# Altium PCB PCB7_main_board.PcbDoc (part 2 of 3)
Units mm, origin at the board's own origin, x right, y up, seen from the top; angles counter-clockwise.
Board outline 169 x 112 mm, 2 copper layers (Top Layer, Bottom Layer); 275 components, 203 nets, 880 pads, 376 vias.
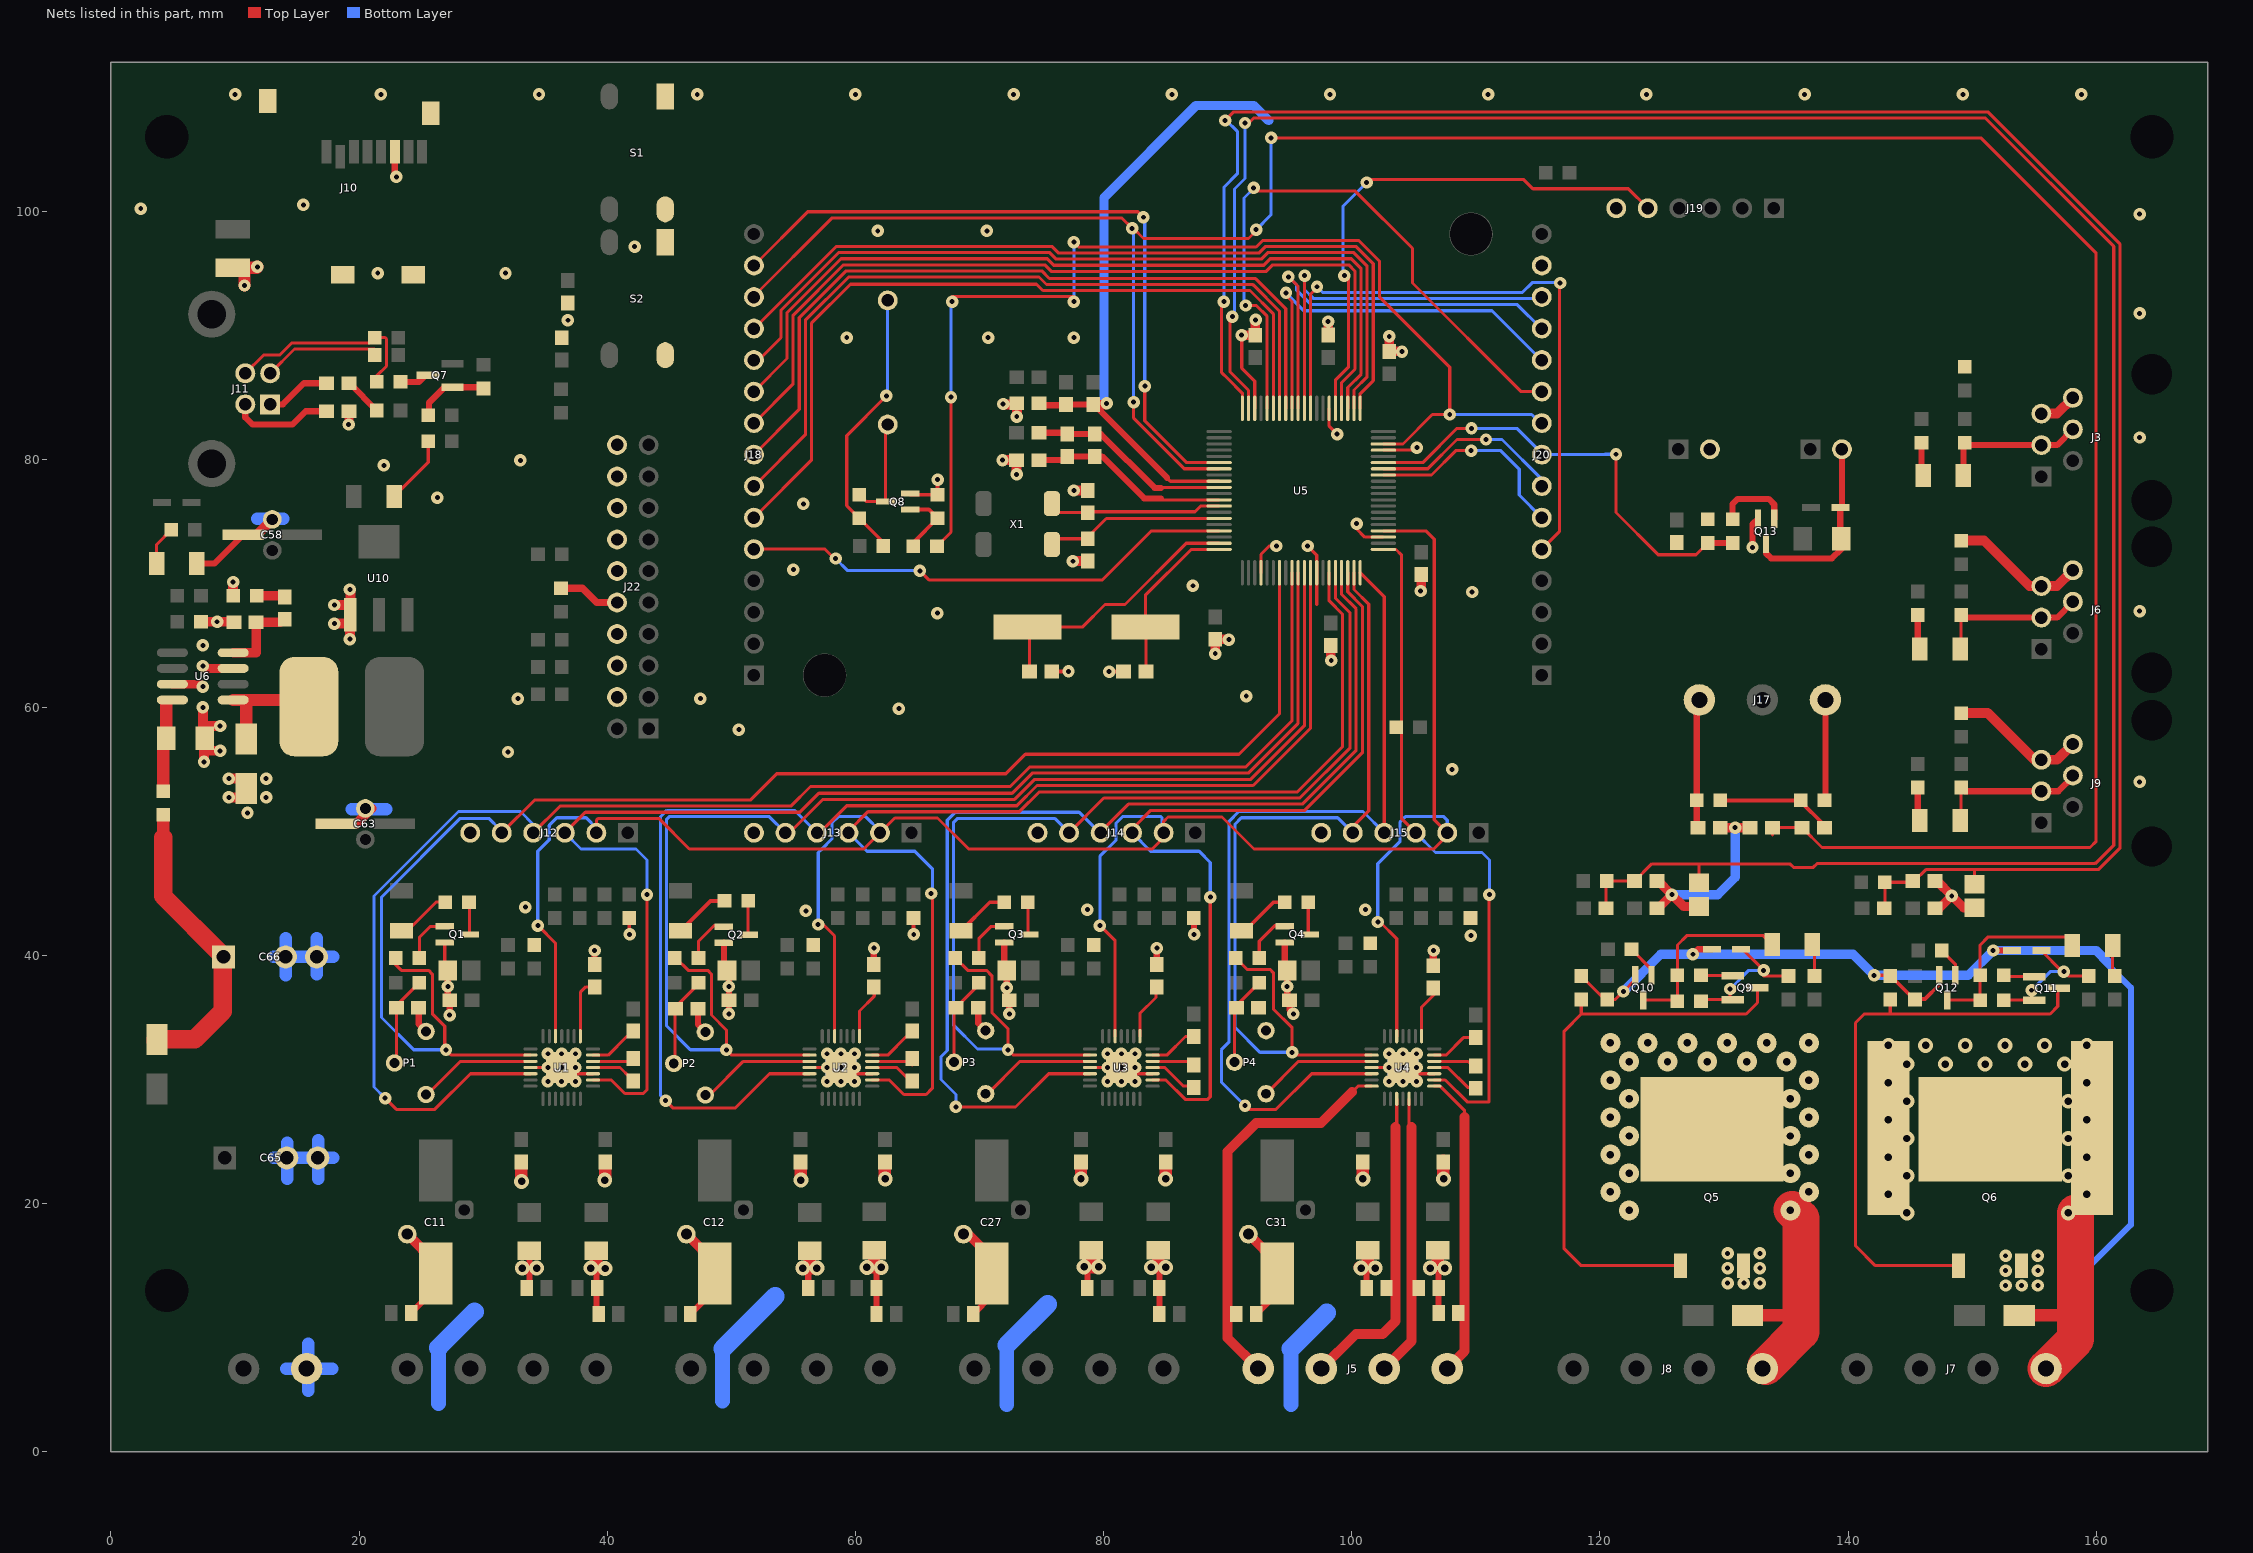
[diagram p2: the nets of this part, all layers, seen from the top]

## Via types
v1: diameter 1, hole 0.4, Top Layer to Bottom Layer, 252 vias
v2: diameter 1.2, hole 0.6, Top Layer to Bottom Layer, 59 vias
v3: diameter 1, hole 0.4, Top Layer to Bottom Layer, tented top, 36 vias
v4: diameter 1.6, hole 0.6, Top Layer to Bottom Layer, 27 vias
v5: diameter 1.6, hole 1, Top Layer to Bottom Layer, 2 vias

## Nets (pads, with @x,y where several pads share a name; then routed paths per layer and width w, separated by ;. In a path a pad name is that pad's centre, name@x,y a point inside that pad or via, vN(x,y) a via of type N, cw(c..) or ccw(c..) an arc to the next point about the centre after c; other vN are vias at no path point) (continued)
DBG_TXD: J19.5 U5.65 | length 43.4
  Top Layer w0.25: U5.65@98.682,84.101 98.682,86.368 99.207,86.893 99.725,87.411 99.725,94.5 v1(99.4,94.799) ; v1@99.3,94.9 v1(99.4,94.799) ; v1(101.2,102.3) 101.434,102.534 113.866,102.534 114.6,101.8 122.3,101.8 J19.5@123.8,100.3
  Bottom Layer w0.25: v1(99.4,94.799) 99.3,94.899 99.3,100.4 v1(101.2,102.3)
E1_MOTOR_1A: J5.2 R110.1 U4.24 | length 25.5
  Top Layer w0.25: 103.52,26.188 103.628,26.296 U4.24@103.628,28.445
  Top Layer w0.8: J5.2@97.54,6.708 100.332,9.5 102.5,9.5 103.52,10.52 103.52,26.188
E1_MOTOR_1B: J5.1 R108.1 U4.21 | length 32.3
  Top Layer w0.25: 100.02,28.988 100.502,29.47 U4.21@101.603,29.47
  Top Layer w0.8: J5.1@92.46,6.708 90,9.168 90,24.2 92.3,26.5 97.532,26.5 100.02,28.988
E1_MOTOR_2A: J5.3 R112.1 U4.26 | length 22.7
  Top Layer w0.25: U4.26@104.628,28.445 104.628,26.38 104.82,26.188
  Top Layer w0.8: J5.3@102.62,6.708 104.82,8.908 104.82,26.188
E1_MOTOR_2B: J5.4 R114.1 U4.1 | length 24.6
  Top Layer w0.25: U4.1@106.653,29.47 107.13,29.47 109.1,27.5 109.1,27
  Top Layer w0.8: J5.4@107.7,6.708 109.1,8.108 109.1,27
EXP_AD1_P1.31: J18.5 U5.17 | length 40.1
  Top Layer w0.25: J18.5@51.82,72.748 57.552,72.748 58.3,72 v1(58.4,72) ; v1(65.2,71) 65.922,70.278 79.91,70.278 83.858,74.226 U5.17@89.307,74.226
  Bottom Layer w0.25: v1(58.4,72) 59.38,71.02 65.18,71.02 v1(65.2,71)
EXP_AD2_P0.25: C69.2 J18.13 L10.1 U5.7 | length 221.6
  Top Layer w0.25: J18.13@51.82,93.068 51.75,93.075 58.125,99.45 81.45,99.45 v1(82.3,98.6) 82.4,98.6 83.216,97.784 91.684,97.784 92.2,98.3 92.2,98.4 v1(92.3,98.5) ; v1@82.42,84.348 82.42,83.308 86.502,79.226 U5.7@89.307,79.226 ; v1(93.5,105.9) 150.7,105.9 160,96.6 160,49.2 159.5,48.7 137.9,48.7 L10.1@136.3,50.3 C69.2@133.9,50.3 ; C69.2@133.8,50.3 C69.2@133.9,50.3 ; 133.9,49.7 C69.2@133.9,50.3
  Bottom Layer w0.25: v1(82.3,98.6) 82.42,98.48 v1(82.42,84.6) v1@82.42,84.325 ; v1(92.3,98.5) 93.5,99.7 v1(93.5,105.9)
EXP_AD3_AOUT_P0.26: J18.14 U5.6 | length 57.4
  Top Layer w0.25: J18.14@51.82,95.608 56.152,99.94 82.76,99.94 v1(83.2,99.5) ; v1(83.32,85.888) 83.32,83.101 86.695,79.726 U5.6@89.307,79.726
  Bottom Layer w0.25: v1(83.2,99.5) 83.32,99.38 83.32,98.425 ; v1(83.32,85.888) 83.32,98.425 ; 83.32,98.595 83.32,98.425
EXP_IO1_P1.15: J20.5 U5.69 | length 52.2
  Top Layer w0.25: U5.69@96.682,84.101 96.682,93.282 97.2,93.8 v1(97.2,93.9) ; J20.5@115.32,72.748 116.735,74.163 116.735,94.135 v1(116.8,94.2)
  Bottom Layer w0.25: v1(97.2,93.9) 97.666,93.434 113.752,93.434 114.551,94.233 116.767,94.233 v1(116.8,94.2)
EXP_IO2_P1.0: J20.10 U5.76 | length 51.1
  Top Layer w0.25: v1(91.45,92.388) 92.31,92.388 93.182,91.516 U5.76@93.182,84.101 ; v1(92.1,101.868) 92.368,101.6 100.293,101.6 104.9,96.993 104.9,94.2 113.652,85.448 J20.10@115.32,85.448
  Bottom Layer w0.25: v1(91.45,92.388) 91.45,92.375 91.449,92.375 91.32,92.388 91.32,101.048 92.12,101.848 v1(92.1,101.868)
EXP_IO3_P1.9: J20.11 U5.72 | length 32.5
  Top Layer w0.25: v1(94.7,93.4) 94.7,93.2 95.184,92.716 95.184,84.103 U5.72@95.182,84.101
  Bottom Layer w0.25: v1@94.8,93.3 v1(94.7,93.4) 94.964,93.136 96.136,91.964 111.311,91.964 115.275,88 J20.11@115.32,87.988
EXP_IO4_P1.10: J20.12 U5.71 | length 33.4
  Top Layer w0.25: v1(94.9,94.7) 95.682,93.918 U5.71@95.682,84.101
  Bottom Layer w0.25: v1(94.9,94.7) 95.565,94.035 95.565,93.619 96.729,92.454 113.346,92.454 J20.12@115.296,90.504 ; J20.12@115.296,90.504 J20.12@115.32,90.528 115.325,90.475 J20.12@115.296,90.504
EXP_IO5_P1.14: J20.13 U5.70 | length 31.5
  Top Layer w0.25: U5.70@96.182,84.101 96.182,94.8 v1(96.2,94.8)
  Bottom Layer w0.25: v1(96.2,94.8) 96.2,93.676 96.932,92.944 115.196,92.944 J20.13@115.276,93.024 ; J20.13@115.243,93.057 J20.13@115.276,93.024 ; J20.13@115.276,93.024 J20.13@115.32,93.068 115.3,93 115.284,93.016 J20.13@115.276,93.024
EXP_IO6_P1.1: J18.6 U5.75 | length 64.7
  Top Layer w0.25: J18.6@51.82,75.288 56.45,79.918 56.45,90.95 59.6,94.1 74.6,94.1 75.11,93.59 91.801,93.59 93.682,91.709 U5.75@93.682,84.101
EXP_IO7_P1.4: J18.7 U5.74 | length 63.7
  Top Layer w0.25: J18.7@51.82,77.828 55.96,81.968 55.96,91.195 59.45,94.685 74.795,94.685 75.4,94.08 92.004,94.08 92.024,94.06 92.057,94.06 94.182,91.935 U5.74@94.182,84.101
EXP_IO8_P1.8: J18.8 U5.73 | length 62.6
  Top Layer w0.25: J18.8@51.82,80.368 55.47,84.018 55.47,91.398 58.386,94.314 ; 58.386,94.314 59.247,95.175 75.025,95.175 75.63,94.57 92.207,94.57 92.227,94.55 92.26,94.55 94.682,92.128 U5.73@94.682,84.101
EXP_MISO1_P0.8: J18.11 U5.62 | length 67.1
  Top Layer w0.25: J18.11@51.82,87.988 52.188,87.988 54,89.8 54,92.007 58.638,96.645 75.662,96.645 76.187,96.12 92.706,96.12 93.231,96.645 98.983,96.645 ; 98.984,96.644 100.164,96.644 101.247,95.562 101.247,86.647 100.182,85.582 U5.62@100.182,84.101
EXP_MOSI1_P0.9: J18.12 U5.61 | length 65.8
  Top Layer w0.25: J18.12@51.8,90.6 J18.12@51.892,90.6 ; J18.12@51.82,90.528 J18.12@51.892,90.6 ; U5.61@100.682,84.101 100.682,85.282 101.735,86.335 101.737,86.337 101.737,95.765 100.367,97.134 99.187,97.134 93.028,97.135 92.503,96.61 76.39,96.61 75.865,97.135 58.435,97.135 51.9,90.6 J18.12@51.892,90.6
EXP_PWM1_P2.5: J20.6 U5.53 | length 17
  Top Layer w0.25: U5.53@102.557,78.726 106.426,78.726 108.388,80.688 v1(109.62,80.688)
  Bottom Layer w0.25: v1(109.62,80.688) 112.012,80.688 113.5,79.2 113.5,77.108 J20.6@115.32,75.288
EXP_PWM2_P2.4: J20.7 U5.54 | length 15.6
  Top Layer w0.25: U5.54@102.557,79.226 106.126,79.226 108.485,81.585 110.817,81.585 v1(110.82,81.588)
  Bottom Layer w0.25: v1(110.82,81.588) 112.112,81.588 115.32,78.38 J20.7@115.32,77.828
EXP_PWM3_FAN_P2.3: J20.8 R11.1 R33.2 U5.55 | length 36.9
  Top Layer w0.25: U5.55@102.557,79.726 105.726,79.726 108.488,82.488 v1(109.65,82.488) ; v1@121.2,80.3 v1(121.3,80.4) 121.3,75.7 124.7,72.3 127.75,72.3 R33.2@128.7,73.25
  Top Layer w0.5: R33.2@128.7,73.25 R11.1@130.7,73.25
  Bottom Layer w0.25: v1(109.65,82.488) 113.312,82.488 115.32,80.48 J20.8@115.32,80.368 120.4,80.368 120.432,80.4 v1(121.3,80.4)
EXP_PWM4_BUZZER_P2.2: J20.9 R99.1 U5.58 | length 90.7
  Top Layer w0.25: R99.1@66.57,72.988 67.7,74.118 v1(67.7,85) ; v1(67.8,92.7) 67.8,93.1 77.6,93.1 v1(77.6,92.7) ; v1(77.6,97.5) 78,97.1 92.3,97.1 92.825,97.625 99.389,97.625 ; 99.39,97.624 100.57,97.624 102.227,95.968 102.227,93.094 107.9,87.421 v1(107.9,83.6) 106.5,83.6 104.126,81.226 U5.58@102.557,81.226
  Bottom Layer w0.25: v1(67.7,85) 67.7,93 67.8,93 v1(67.8,92.7) ; v1(77.6,92.7) 77.6,93.1 v1(77.6,97.5) ; v1(107.9,83.6) 114.5,83.6 115,83.1 115.128,83.1 J20.9@115.32,82.908
EXP_SCK1_P0.7: J18.10 U5.63 | length 68
  Top Layer w0.25: J18.10@51.82,85.448 54.49,88.118 54.49,91.804 58.841,96.155 75.459,96.155 75.984,95.63 92.909,95.63 93.434,96.155 98.78,96.155 ; 98.781,96.154 99.961,96.154 100.757,95.359 100.757,86.857 99.682,85.782 U5.63@99.682,84.101
EXP_SSEL1_P0.6: J18.9 U5.64 | length 69.1
  Top Layer w0.25: J18.9@51.82,82.908 54.98,86.068 54.98,91.601 59.044,95.665 75.256,95.665 75.781,95.14 93.112,95.14 93.637,95.665 98.577,95.665 ; 98.578,95.664 99.758,95.664 100.267,95.156 100.267,87.26 99.182,86.175 U5.64@99.182,84.101
GND: C3.1 C4.1 C5.1 C6.1 C7.2 C8.1 C9.1 C10.1 C11.2 C12.2 C15.1 C16.1 C17.1 C18.2 C21.1 C22.1 C23.1 C24.1 C25.1 C26.1 C27.2 C28.1 C29.1 C31.2 C33.1 C34.1 C35.1 C36.1 C43.1 C44.1 C45.2 C46.2 C47.2 C48.2 C49.2 C52.2 C55.2 C56.2 C57.1 C58.2 C59.1 C60.1 C62.1 C63.2 C64.1 C65.2 C66.2 C67.1 D12.1 D13.1 D17.2 D18.2 J3.5 J3.6 J6.5 J6.6 J9.5 J9.6 J10.6 J10.9 J12.6 J13.6 J14.6 J15.6 J19.6 J20.14 J21.2 J22.4 J22.6 J22.8 J22.10 J22.12 J22.14 J22.16 J22.18 J22.20 J23.2 L6.1 L8.1 L12.2 P1.1 P2.1 P3.1 P4.1 Q1.2 Q2.2 Q3.2 Q4.2 Q5.3 Q6.3 Q8.2 Q10.2 Q12.2 Q13.2 R20.1 R21.1 R22.1 R23.1 R26.1 R27.1 R28.1 R29.1 R33.1 R34.2 R39.2 R40.2 R49.1 R50.1 R51.1 R52.1 R55.1 R56.1 R57.1 R58.1 R64.1 R70.1 R71.1 R73.2 R78.2 R79.2 R80.2 R81.2 R82.2 R83.1 R92.1 R94.1 R95.1 R97.1 R100.1 R102.1 R104.1 R108.2 R109.2 R110.2 R111.2 R112.2 R113.2 R114.2 S1.1 S1.2 S2.1 S2.2 U1.3 U1.18 U1.29 U2.3 U2.18 U2.29 U3.3 U3.18 U3.29 U4.3 U4.18 U4.29 U5.24 U5.33 U5.43 U5.57 U5.66 U5.78 U6.3 U6.7 U10.1 | length 430.9
  Top Layer w0.25: Q1.2@26.9,41.05 26.9,39.05 C4.1@27.15,38.8 ; U1.18@33.803,30.97 v3(35.218,30.97) v3(36.328,30.97) 36.828,30.47 37.438,30.47 U1.3@38.853,30.47 ; U2.18@56.303,30.97 v3(57.718,30.97) v3(58.828,30.97) 59.328,30.47 59.938,30.47 U2.3@61.353,30.47 ; U3.18@78.903,30.97 v3(80.318,30.97) v3(81.428,30.97) 81.928,30.47 82.538,30.47 U3.3@83.953,30.47 ; v1@91.137,89.988 91.137,87.338 92.182,86.293 U5.78@92.182,84.101 ; U5.24@92.682,70.851 92.682,72.332 93.352,73.002 v1(93.926,73.002) ; v1(96.448,73.002) 97.182,72.268 U5.33@97.182,70.851 97.182,68.31 ; U5.66@98.182,84.101 98.182,82.668 v1(98.825,82.025) ; v1(100.4,74.8) 100.4,74.375 101.059,73.716 U5.43@102.527,73.716 ; U4.18@101.603,30.97 v3(103.018,30.97) 104.128,30.97 104.628,30.47 U4.29@104.992,30.47 ; U5.57@102.557,80.726 105.026,80.726 v1@105.036,80.736 ; U4.29@104.638,30.46 U4.29@104.992,30.47 ; v1@105.075,80.775 v1@105.036,80.736 ; v1(105.25,80.925) 105.061,80.736 v1@105.036,80.736 ; U4.29@105.257,30.478 105.252,30.477 105.221,30.476 U4.29@104.992,30.47 ; U4.3@106.653,30.47 105.238,30.47 U4.29@104.992,30.47 ; R71.1@118.5,38.35 120.4,36.45 R92.1@120.6,36.45 121.25,36.45 v1(121.9,37.1) 122.85,38.05 Q10.2@122.85,38.4
  Top Layer w0.3: R28.1@41.778,43.02 41.778,41.722 v1(41.8,41.7) ; Q8.2@64.42,77.238 64.42,77.138 R100.1@66.62,77.138 66.62,78.345 v1(66.625,78.35) ; R29.1@64.678,43.02 64.678,41.722 v1(64.7,41.7) ; C55.2@75.82,62.888 77.163,62.888 v1(77.175,62.9) ; v1(80.45,62.875) 80.463,62.888 C56.2@81.62,62.888 ; v1(142.1,38.4) 143.4,38.4 143.425,38.375 145.3,36.5 145.4,36.5 146.2,36.5 147.35,37.65 Q12.2@147.35,38.4
  Top Layer w0.5: D13.1@6.925,71.6 8.345,71.6 C58.2@10.645,73.9 ; J10.6@22.878,104.77 22.878,102.872 v1(23,102.75) ; R34.2@24.2,11.2 26.178,13.178 C11.2@26.178,14.37 ; C17.1@24.8,35.8 24.8,34.48 P1.1@25.4,33.88 ; C4.1@27.15,38.8 v1(27.15,37.5) 27.15,36.55 C3.1@27.3,36.4 v1(27.3,35.2) ; R40.2@33.5,13.2 33.72,13.42 v2@33.72,14.8 ; v2@33.72,14.8 33.72,14.9 R21.1@33.72,16.188 ; C15.1@38.978,39.27 v1(38.978,40.4) ; R20.1@39.12,16.188 39.12,14.8 39.12,14.775 39.12,13.2 39.12,11.28 R80.2@39.3,11.1 ; R39.2@46.7,11.1 48.678,13.078 C12.2@48.678,14.37 ; C18.2@47.3,35.7 47.3,34.44 P2.1@47.9,33.84 ; Q2.2@49.4,41.02 49.4,39.05 C6.1@49.65,38.8 49.8,38.65 v1(49.8,37.5) C5.1@49.8,36.4 v1(49.8,35.3) ; R73.2@56.2,13.2 56.2,14.68 v2@56.32,14.8 ; C16.1@61.478,39.27 61.478,40.578 v1(61.5,40.6) ; v2@61.5,14.862 61.7,14.662 R79.2@61.7,13.2 R81.2@61.7,11.1 ; R82.2@69.5,11.1 71,12.6 C27.2@71,14.37 ; C35.1@69.9,35.8 69.9,34.54 P3.1@70.5,33.94 ; Q3.2@72,41.05 72,39 C22.1@72.2,38.8 v1(72.2,37.4) 72.2,36.6 C21.1@72.4,36.4 v1(72.4,35.3) ; R109.2@78.7,13.2 78.7,14.442 78.792,14.534 v2@79.12,14.862 ; C33.1@84.278,39.27 84.278,40.578 v1(84.3,40.6) ; R113.2@84.5,11.1 R111.2@84.5,13.2 84.5,14.842 v2@84.52,14.862 ; R56.1@87.278,43.02 87.278,41.722 v1(87.3,41.7) ; R108.2@92.3,11.1 93.978,12.778 C31.2@93.978,14.37 ; Q4.2@94.6,41.05 94.6,39 C24.1@94.8,38.8 v1(94.8,37.5) 94.8,36.6 C23.1@95,36.4 95,35.6 v1(95.3,35.3) ; v2(100.75,14.8) 101.2,14.8 R110.2@101.2,13.2 ; R114.2@107,11.2 R112.2@107,13.2 107,14.8 107,14.862 v2@107.02,14.862 ; 127.9,40.5 D17.2@129.025,40.5 ; v1(132.3,72.9) 132.3,74.75 Q13.2@132.75,75.2 ; v1(151.7,40.4) D18.2@153.225,40.4
  Top Layer w0.6: R83.1@36.27,69.598 38.002,69.598 39.152,68.448 J22.10@40.79,68.448 ; C34.1@106.578,39.17 106.578,40.378 v1(106.6,40.4)
  Top Layer w0.7: U6.7@4.95,61.865 7.235,61.865 v1@7.4,61.7 ; v1@7.598,63.135 U6.3@9.85,63.135
  Top Layer w0.75: v1(7.4,63.333) v1@7.598,63.135 ; v1(19.15,82.8) 19.178,82.828 L12.2@19.178,83.87 ; v2@33.72,14.8 v2@33.72,14.9 ; v1(89,64.325) C43.1@89,65.488 90.062,65.488 v1(90.1,65.45) ; v1(91.125,90) 91.137,89.988 C45.2@92.22,89.988 92.22,91.195 v1(92.25,91.225) ; C48.2@98.1,90 98.1,91.099 98.1,91.15 98.104,91.146 v1(98.104,91.099) ; C47.2@98.3,65 98.3,63.825 v1(98.35,63.775) ; v1(103.025,89.9) 103.02,89.895 C46.2@103.02,88.688 104.037,88.688 v1(104.05,88.675) ; v1(105.55,69.375) 105.6,69.425 C44.1@105.6,70.7
  Top Layer w0.8: R102.1@7.25,66.9 v1(8.55,66.9) 9.85,66.9 C67.1@9.9,66.85 ; v1(7.4,60) 7.4,57.5 C64.1@7.5,57.5 ; v1(7.5,55.6) C64.1@7.5,57.5 ; v1(8.8,56.5) 7.55,56.5 C64.1@7.55,57.5 ; v1@8.9,58.5 v1(8.8,58.5) 7.55,58.5 C64.1@7.55,57.5 ; v1(9.5,52.75) 10.9,52.75 D12.1@10.9,53.45 D12.1@10.9,54 ; v1(9.5,54.25) 10.9,54.25 D12.1@10.9,54 ; R95.1@9.85,69 v1(9.85,70.1) ; C58.2@10.645,73.9 11.75,73.9 C58.2@13,75.15 ; v1@10.9,51.5 v1(11,51.5) ; D12.1@11.25,54.25 D12.1@10.9,54 ; v1(18,66.75) U10.1@19.25,66.75 ; v1(18,68.25) U10.1@19.3,68.25 ; C63.2@18.645,50.6 19.75,50.6 20.75,51.6 C63.2@21,51.85 ; v1(19.25,65.5) U10.1@19.25,66.75 ; v1(19.25,69.5) 19.3,69.5 U10.1@19.3,68.25 ; C11.2@23.878,17.54 26.178,15.24 C11.2@26.178,14.37 ; C12.2@46.378,17.54 48.678,15.24 C12.2@48.678,14.37 ; C27.2@69.078,17.54 71.378,15.24 C27.2@71.378,14.37 ; v1(71.85,79.925) 71.95,79.925 71.951,79.926 L6.1@72.982,79.926 72.982,78.793 v1(73,78.775) ; v1@71.9,84.425 L8.1@72.975,84.425 ; v1(73.003,83.424) v1@73.003,83.411 ; L8.1@73.025,84.467 73.025,83.499 73.006,83.423 v1@73.003,83.411 ; v1(77.525,71.775) 77.538,71.788 C52.2@78.72,71.788 ; v1(77.6,77.475) 77.613,77.488 C49.2@78.72,77.488 ; C31.2@91.678,17.54 93.978,15.24 C31.2@93.978,14.37 ; R104.1@149.12,59.538 151.262,59.538 155.025,55.775 J9.5@155.583,55.775 156.853,55.775 J9.6@158.123,57.045 ; R97.1@149.12,73.438 150.962,73.438 154.625,69.775 J6.5@155.583,69.775 156.853,69.775 J6.6@158.123,71.045 ; J3.5@155.583,83.675 156.853,83.675 J3.6@158.123,84.945 ; C64.1@7.5,57.5 C64.1@7.55,57.5 ; U10.1@19.25,66.75 19.25,67.45 U10.1@19.3,67.45 ; U10.1@19.25,66.75 19.3,66.75 U10.1@19.3,67.45 ; U10.1@19.3,67.45 U10.1@19.3,68.25 ; v1@73.003,83.411 73,83.4 73.003,83.403 v1@73.003,83.411
  Top Layer w1: C57.1@9.82,95.438 C57.1@10.758,95.438 ; v1(10.758,94) C57.1@10.758,95.438 ; v1(11.8,95.5) 11.738,95.438 C57.1@10.758,95.438 ; C8.1@33.078,23.37 33.078,21.922 33.1,21.9 v2(33.1,21.8) ; v2@33.1,14.8 v2(33.15,14.8) v2@33.72,14.8 ; v2@33.82,14.8 v2(34.3,14.8) ; v2@38.627,14.8 v2(38.677,14.8) v2@39.12,14.8 ; v2@39.12,14.9 R20.1@39.12,16.188 ; v2@39.22,14.8 v2@39.825,14.8 ; v2(39.8,21.9) 39.828,21.928 C7.2@39.828,23.37 ; C9.1@55.578,23.37 55.578,21.922 v2(55.6,21.9) ; v2@55.7,14.8 v2(55.75,14.8) v2@56.32,14.8 ; v2@56.32,14.9 R23.1@56.32,16.188 ; v2@56.42,14.8 v2(56.9,14.8) ; v2@60.88,14.862 v2(60.93,14.862) v2@61.5,14.862 ; v2@61.5,14.962 R22.1@61.5,16.25 ; v2@61.6,14.862 v2(62.08,14.862) ; C10.1@62.378,23.37 62.378,22.022 v2(62.4,22) ; C25.1@78.178,23.37 78.178,22.022 78.189,22.011 v2@78.2,22 ; v2@78.4,14.862 78.427,14.862 v2@79.02,14.862 ; v2@79.02,14.962 R50.1@79.02,16.25 ; v2@79.12,14.862 v2@79.6,14.862 ; v2@83.8,14.862 v2(83.85,14.862) v2@84.42,14.862 ; v2@84.42,14.962 R49.1@84.42,16.25 ; v2@84.52,14.862 v2(85,14.862) ; v2@85.02,22.02 v2(85,22) 85,23.35 C26.1@85.02,23.37 ; v2@100.658,14.862 100.75,14.862 v2@101.278,14.862 ; C29.1@100.878,23.37 100.878,22.022 v2(100.9,22) ; v2@101.278,14.962 R52.1@101.278,16.25 ; v2@101.378,14.862 v2@101.858,14.862 ; v2@106.3,14.862 106.327,14.862 v2@106.92,14.862 ; 106.92,14.962 R51.1@106.92,16.25 ; v2@107.02,14.862 v2@107.5,14.862 ; C28.1@107.378,23.47 C28.1@107.378,23.37 107.378,22.022 v2(107.4,22)
  Bottom Layer w0.5: 158.2,13.7 162.8,18.3 162.8,37.4 160.9,39.3
  Bottom Layer w0.75: v1(121.9,37.1) 124.9,40.1 v1(127.5,40.1) 140.4,40.1 v1(142.1,38.4) 149.7,38.4 v1(151.7,40.4) 160,40.4 161,39.4
  Bottom Layer w1: 11.8,75.2 13,75.2 13.9,75.2 ; 13.1,23.7 14.17,23.7 C65.2@14.2,23.7 ; 13.1,39.9 14.07,39.9 C66.2@14.1,39.9 ; 14.1,38.4 14.1,39.888 C66.2@14.1,39.9 ; 14.1,41.4 C66.2@14.1,39.9 ; 14.132,6.692 14.14,6.7 15.768,6.7 15.776,6.7 15.9,6.576 15.9,4.924 ; 14.2,22 14.2,23.688 C65.2@14.2,23.7 ; 14.2,24.9 C65.2@14.2,23.7 ; 15.9,8.7 15.9,6.708 15.9,6.7 17.824,6.7 ; 16.6,38.5 16.6,39.888 C66.2@16.6,39.9 ; 16.6,41.4 C66.2@16.6,39.9 ; 16.7,22 16.7,23.688 C65.2@16.7,23.7 ; 16.7,25.1 C65.2@16.7,23.7 ; 17.9,23.7 C65.2@16.7,23.7 ; 17.9,39.9 C66.2@16.6,39.9 ; 19.4,51.8 20.5,51.8 22.2,51.8 ; C66.2@14.1,39.9 16.57,39.9 C66.2@16.6,39.9 ; C65.2@14.2,23.7 16.67,23.7 C65.2@16.7,23.7
  Bottom Layer w1.2: 26.4,3.9 26.4,8.4 ; 49.3,4.1 49.3,8.3 ; 72.2,3.8 72.2,8.6 ; 95.1,3.8 95.1,8.3
  Bottom Layer w1.5: 26.4,8.4 29.3,11.3 ; 49.3,8.3 53.537,12.537 ; 72.2,8.6 75.5,11.9 ; 95.1,8.3 98,11.2
  other v1: 152.7,13.4 154,13.4 155.3,13.4 130.3,13.6 131.6,13.6 132.9,13.6 152.7,14.6 155.3,14.6 130.3,14.8 132.9,14.8 152.7,15.8 155.3,15.8 130.3,16 132.9,16 109.6,41.6 56,43.6 78.7,43.7 101.1,43.7 33.4,43.9 12.5,52.75 163.5,54 12.5,54.25 108.1,55 32,56.4 50.6,58.2 63.5,59.9 32.8,60.7 47.5,60.7 91.5,60.9 7.4,61.667 7.4,65 66.6,67.6 163.5,67.75 109.7,69.3 87.2,69.8 55,71.1 55.8,76.4 26.3,76.9 22,79.5 33,79.9 163.5,81.75 71.9,84.45 59.3,89.8 70.7,89.8 77.6,89.8 36.82,91.2 163.5,91.75 21.5,95 31.8,95 42.2,97.136 61.8,98.4 70.6,98.4 163.5,99.75 2.4,100.2 15.5,100.5 10,109.4 21.75,109.4 34.5,109.4 47.25,109.4 60,109.4 72.75,109.4 85.5,109.4 98.25,109.4 111,109.4 123.75,109.4 136.5,109.4 149.25,109.4 158.8,109.4
  other v2: 39.825,14.775 101.9,14.8 106.327,14.8 107.5,14.8 78.427,14.9 79.6,14.9 78.178,22
  other v3: 35.218,29.86 36.328,29.86 37.438,29.86 57.718,29.86 58.828,29.86 59.938,29.86 80.318,29.86 81.428,29.86 82.538,29.86 103.018,29.86 104.128,29.86 105.238,29.86 37.438,30.97 59.938,30.97 82.538,30.97 104.128,30.97 105.238,30.97 35.218,32.08 36.328,32.08 37.438,32.08 57.718,32.08 58.828,32.08 59.938,32.08 80.318,32.08 81.428,32.08 82.538,32.08 103.018,32.08 104.128,32.08 105.238,32.08
GND_A: C37.1 C38.1 C39.1 C40.1 C53.1 C54.1 C69.1 L3.1 L4.1 L8.2 L11.1 U5.9 | length 75.3
  Top Layer w0.25: 85.12,78.488 85.382,78.226 U5.9@89.307,78.226
  Top Layer w0.5: L8.2@74.8,84.35 C53.1@76.782,84.35 ; C53.1@77.032,84.4 79.232,84.4 85.12,78.512 85.12,78.488
  Top Layer w0.75: C54.1@79.232,84.4 80.15,84.4 v1(80.25,84.5) ; L4.1@124.6,43.8 124.7,43.8 v1(125.8,44.9) ; C39.1@124.6,46 124.7,46 v1(125.8,44.9) ; C40.1@128,43.95 126.75,43.95 v1(125.8,44.9) ; L11.1@129.6,50.3 L11.1@129.7,50.3 v1(130.9,50.3) C69.1@132.1,50.3 ; L3.1@147.02,43.8 147.352,43.8 v1(148.361,44.809) ; C37.1@147.02,46 147.17,46 v1(148.361,44.809) ; C38.1@150.2,43.85 149.32,43.85 v1(148.361,44.809)
  Bottom Layer w0.75: v1(80.25,84.5) 80.031,84.719 80.031,101.083 87.449,108.5 92.1,108.5 93.3,107.3 ; v1(125.8,44.9) 129.5,44.9 130.9,46.3 v1(130.9,50.3)
ME_DIR: J15.4 U4.19 U5.40 | length 70.7
  Top Layer w0.25: v1@91.4,27.6 93.9,27.6 96.77,30.47 U4.19@101.603,30.47 ; U5.40@100.682,70.851 102.62,68.913 J15.4@102.62,49.888
  Bottom Layer w0.25: v1(91.4,27.9) 89.495,29.805 89.495,32.395 90.1,33 90.1,50.793 90.907,51.6 100.908,51.6 J15.4@102.62,49.888
ME_EN: J15.3 R115.2 U4.2 U5.41 | length 55.9
  Top Layer w0.25: U5.41@102.557,72.726 103.574,72.726 104,72.3 104,51.048 J15.3@105.16,49.888 ; U4.2@106.653,29.97 107.53,29.97 109.3,28.2 111.05,28.2 v1@111.05,44.85
  Bottom Layer w0.25: J15.3@105.16,49.888 106.748,48.3 110.5,48.3 111.1,47.7 v1(111.1,44.9)
ME_STEP: J15.5 R54.2 U4.16 U5.39 | length 71.1
  Top Layer w0.25: R54.2@90.65,39.8 91.565,38.885 93.415,38.885 93.685,38.615 93.685,35.692 95.2,34.177 v1(95.2,32.2) 95.43,31.97 U4.16@101.603,31.97 ; J15.5@100.08,49.888 100.08,50.38 101.37,51.67 101.37,68.309 100.182,69.497 U5.39@100.182,70.851
  Bottom Layer w0.25: v1(95.2,32.2) 92.6,32.2 90.6,34.2 90.6,50.6 91.1,51.1 98.868,51.1 J15.5@100.08,49.888
MN_RST: J12.2 J13.2 J14.2 J15.2 U1.12 U2.12 U3.12 U4.12 U5.44 | length 198.2
  Top Layer w0.25: v1@34.423,42.4 35.828,40.995 U1.12@35.828,33.495 ; J12.2@39.12,49.888 39.12,50.888 39.285,51.053 44.155,51.053 46.62,48.588 60.68,48.588 J13.2@61.98,49.888 63.18,51.088 66.62,51.088 69.12,48.588 83.92,48.588 84.84,49.508 84.84,50.808 85.19,51.158 89.55,51.158 92.12,48.588 106.62,48.588 107.7,49.668 J15.2@107.7,49.888 106.65,50.938 106.65,73.55 105.974,74.226 U5.44@102.557,74.226 ; v1(57,42.5) 57,42.62 57.28,42.62 58.318,41.582 58.318,33.505 U2.12@58.328,33.495 ; v1(79.7,42.4) 79.728,42.4 80.928,41.2 U3.12@80.928,33.495 ; v1(102.1,42.7) 102.282,42.7 103.628,41.354 U4.12@103.628,33.495
  Bottom Layer w0.25: v1(34.4,42.4) 34.4,48.4 35.32,49.32 35.32,50.488 35.932,51.1 38.3,51.1 39.12,50.28 J12.2@39.12,49.888 ; v1(57,42.5) 57,48.3 57.315,48.615 58.108,49.408 58.108,50.676 58.62,51.188 60.82,51.188 61.98,50.028 J13.2@61.98,49.888 ; v1(79.7,42.4) 79.7,47.988 81,49.288 81,50.668 81.52,51.188 84.62,51.188 84.72,51.088 84.72,50.461 84.35,50.091 J14.2@84.35,49.888 ; v1(102.1,42.7) 102.1,47.4 103.9,49.2 103.9,50.768 104.32,51.188 107.42,51.188 107.7,50.908 J15.2@107.7,49.888
MX_DIR: J12.4 U1.19 U5.29 | length 123.5
  Top Layer w0.25: v1(22.1,28.5) 23,27.6 26.1,27.6 28.97,30.47 U1.19@33.803,30.47 ; J12.4@34.04,49.888 36.185,52.033 54.8,52.033 56.385,53.618 72.478,53.618 74.05,55.19 91.465,55.19 95.148,58.873 95.148,58.907 ; 95.182,58.907 U5.29@95.182,70.851
  Bottom Layer w0.25: v1(22.1,28.5) 21.2,29.4 21.2,44.793 28.007,51.6 33,51.6 34.04,50.56 J12.4@34.04,49.888
MX_EN: J12.3 U1.2 U5.30 | length 105.8
  Top Layer w0.25: J12.3@36.58,49.888 38.235,51.543 55.522,51.543 57.056,53.076 72.629,53.076 74.253,54.7 91.668,54.7 95.638,58.67 95.638,58.714 ; U1.2@38.853,29.97 40.33,29.97 41.42,28.88 42.905,28.88 43.2,29.175 v1(43.2,44.9) ; 95.682,58.714 U5.30@95.682,70.851
  Bottom Layer w0.25: J12.3@36.58,49.888 37.88,48.588 42.312,48.588 43.2,47.7 v1(43.2,44.9)
MX_STEP: J12.5 R24.2 U1.16 U5.27 | length 125.3
  Top Layer w0.25: R24.2@22.95,39.8 22.95,39.25 23.4,38.8 25.6,38.8 25.9,38.5 25.9,35.3 26.9,34.3 26.9,32.5 v1(27,32.4) 27.43,31.97 31.502,31.97 U1.16@33.803,31.97 ; J12.5@31.5,49.888 34.135,52.523 51.523,52.523 53.651,54.651 72.125,54.651 73.644,56.17 73.694,56.22 90.92,56.22 94,59.3 94.182,59.482 U5.27@94.182,70.851
  Bottom Layer w0.25: v1(27,32.4) 24.4,32.4 21.8,35 21.8,44.7 28.153,51.053 30.447,51.053 31.35,50.15 31.35,49.738 31.5,49.588 31.8,49.588 J12.5@31.5,49.888
MY_DIR: J13.4 U2.19 U5.32 | length 105.5
  Top Layer w0.25: v1(44.7,28.3) 45.305,27.695 50.295,27.695 53.07,30.47 54.628,30.47 U2.19@56.303,30.47 ; J13.4@56.9,49.888 57.115,49.888 59.3,52.073 73.012,52.073 74.639,53.7 92.054,53.7 96.682,58.328 ; 96.682,58.318 96.682,58.328 ; U5.32@96.682,70.851 96.682,58.328
  Bottom Layer w0.25: v1(44.7,28.3) 44.295,28.705 44.295,51.195 44.8,51.7 55.088,51.7 J13.4@56.9,49.888 J13.4@56.888,49.888
MY_EN: J13.3 U2.2 U5.35 | length 88.4
  Top Layer w0.25: J13.3@59.44,49.888 59.44,50.023 61,51.583 73.215,51.583 74.812,53.18 95.619,53.18 99.26,56.821 99.26,67.506 98.182,68.584 U5.35@98.182,70.851 ; U2.2@61.353,29.97 62.73,29.97 63.9,28.8 65.7,28.8 66.2,29.3 v1@66.2,45
  Bottom Layer w0.25: J13.3@59.44,49.888 60.928,48.4 64.788,48.4 66.2,46.988 v1@66.2,45
  other v1: 66.1,45
MY_STEP: J13.5 R25.2 U2.16 U5.31 | length 107.2
  Top Layer w0.25: R25.2@45.45,39.8 45.52,39.8 46.52,38.8 48.1,38.8 48.4,38.5 48.4,35.2 49.6,34 v1(49.6,32.4) 50.03,31.97 U2.16@56.303,31.97 ; J13.5@54.36,49.888 54.688,49.888 57.383,52.583 72.829,52.583 74.446,54.2 91.861,54.2 96.18,58.519 96.18,60.409 96.182,60.411 U5.31@96.182,70.851
  Bottom Layer w0.25: v1(49.6,32.4) 46.7,32.4 44.785,34.315 44.785,50.992 44.981,51.188 53.06,51.188 J13.5@54.36,49.888
MZ_DIR: J14.4 U3.19 U5.37 | length 87.4
  Top Layer w0.25: v1(68.1,27.795) 72.895,27.795 75.57,30.47 U3.19@78.903,30.47 ; J14.4@79.76,49.888 79.76,49.96 82,52.2 96.025,52.2 100.36,56.535 100.36,67.933 99.182,69.111 U5.37@99.182,70.851
  Bottom Layer w0.25: v1(68.1,27.795) 68.1,28.795 66.895,30 66.895,31.841 67.4,32.346 67.4,50.9 68.043,51.543 78.032,51.543 79.687,49.888 J14.4@79.76,49.888 79.82,49.828 J14.4@79.728,49.828
MZ_EN: J14.3 U3.2 U5.38 | length 68
  Top Layer w0.25: J14.3@82.3,49.888 82.3,50.2 83.8,51.7 96.218,51.7 100.86,56.342 100.86,68.126 99.682,69.304 U5.38@99.682,70.851 ; U3.2@83.953,29.97 85.012,29.97 86.577,28.405 88.4,28.405 88.6,28.605 v1(88.6,44.7)
  Bottom Layer w0.25: J14.3@82.3,49.888 83.788,48.4 87.7,48.4 88.6,47.5 v1(88.6,44.7)
MZ_STEP: J14.5 R53.2 U3.16 U5.36 | length 88.4
  Top Layer w0.24: U5.36@98.682,70.851 98.682,68.818 99.87,67.63 99.87,67.3
  Top Layer w0.25: R53.2@68.05,39.8 69.05,38.8 70.566,38.8 71,38.366 71,35.4 72.3,34.1 v1(72.3,32.4) 72.72,31.98 78.893,31.98 U3.16@78.903,31.97 ; J14.5@77.22,49.888 80.022,52.69 95.822,52.69 99.87,56.738 99.87,67.3
  Bottom Layer w0.25: v1(72.3,32.4) 72.235,32.465 69.835,32.465 67.89,34.41 67.89,50.697 68.246,51.053 76.055,51.053 J14.5@77.22,49.888
NetC1_1: C1.1 U1.5 | length 3
  Top Layer w0.25: U1.5@38.853,31.47 41.778,31.47 C1.1@41.824,31.424
NetC1_2: C1.2 U1.4 | length 3.6
  Top Layer w0.25: U1.4@38.853,30.97 41.03,30.97 41.824,30.176 C1.2@41.824,29.9
NetC2_1: C2.1 U2.4 | length 3.7
  Top Layer w0.25: U2.4@61.353,30.97 63.33,30.97 64.4,29.9 C2.1@64.578,29.9
NetC2_2: C2.2 U2.5 | length 3.3
  Top Layer w0.25: U2.5@61.353,31.47 64.278,31.47 C2.2@64.578,31.17
NetC13_1: C13.1 U1.6 | length 3.8
  Top Layer w0.25: U1.6@38.853,31.97 40.07,31.97 41.57,33.47 C13.1@42.078,33.47
NetC14_1: C14.1 U2.6 | length 3.8
  Top Layer w0.25: U2.6@61.353,31.97 62.602,31.97 64.102,33.47 C14.1@64.578,33.47
NetC15_2: C15.2 U1.8 | length 4.9
  Top Layer w0.25: U1.8@37.828,33.495 37.828,37.028 38.27,37.47 C15.2@38.978,37.47
NetC16_2: C16.2 U2.8 | length 4.5
  Top Layer w0.25: U2.8@60.328,33.495 60.328,35.528 61.52,36.72 61.52,37.428 C16.2@61.478,37.47
NetC17_2: C17.2 P1.2 R18.1 | length 7.3
  Top Layer w0.25: P1.2@22.86,31.34 23,31.48 23,35.95 R18.1@24.85,37.8
NetC18_1: C18.1 P2.2 R19.1 | length 7.3
  Top Layer w0.25: P2.2@45.36,31.3 45.45,31.39 45.45,35.8 R19.1@47.3,37.65
  Top Layer w0.5: R19.1@47.3,37.65 R19.1@47.3,37.8
NetC19_1: C19.1 U3.5 | length 3.4
  Top Layer w0.25: U3.5@83.953,31.47 86.978,31.47 C19.1@87.278,31.17
NetC19_2: C19.2 U3.4 | length 4
  Top Layer w0.25: U3.4@83.953,30.97 84.938,30.97 86.42,29.488 87.16,29.488 C19.2@87.278,29.37
NetC20_1: C20.1 U4.4 | length 3.7
  Top Layer w0.25: U4.4@106.653,30.97 107.738,30.97 109.338,29.37 C20.1@109.678,29.37
NetC20_2: C20.2 U4.5 | length 3.1
  Top Layer w0.25: U4.5@106.653,31.47 109.378,31.47 C20.2@109.678,31.17
NetC30_1: C30.1 U3.6 | length 3.9
  Top Layer w0.25: U3.6@83.953,31.97 85.102,31.97 86.602,33.47 C30.1@87.278,33.47
NetC32_1: C32.1 U4.6 | length 3.9
  Top Layer w0.25: U4.6@106.653,31.97 107.602,31.97 109.002,33.37 C32.1@110,33.4
NetC33_2: C33.2 U3.8 | length 4.5
  Top Layer w0.25: U3.8@82.928,33.495 82.928,35.328 84.22,36.62 84.22,37.412 C33.2@84.278,37.47
NetC34_2: C34.2 U4.8 | length 4.3
  Top Layer w0.25: U4.8@105.628,33.495 105.628,35.828 106.62,36.82 106.62,37.328 C34.2@106.578,37.37
NetC35_2: C35.2 P3.2 R47.1 | length 7.2
  Top Layer w0.25: P3.2@67.96,31.4 67.96,35.66 69.95,37.65 R47.1@69.95,37.8
NetC36_2: C36.2 P4.2 R48.1 | length 7.2
  Top Layer w0.25: P4.2@90.56,31.4 90.56,35.66 C36.2@90.7,35.8 90.7,35.95 R48.1@92.55,37.8
NetC37_2: C37.2 C38.2 L1.1 R59.1 U5.80 | length 173.4
  Top Layer w0.25: v1@89.519,92.519 89.519,86.981 90,86.5 ; v1(89.8,107.3) 90.495,107.995 151.268,107.995 161.905,97.358 161.905,48.642 160.178,46.915 ; 90.002,86.502 91.182,85.323 U5.80@91.182,84.101 ; L1.1@142.92,43.8 142.97,43.85 R59.1@142.97,45.9 145.12,45.9 C37.2@145.22,46 145.354,46 146.269,46.915 147.771,46.915 160.115,46.915 ; C38.2@150.2,45.75 150.2,46.915
  Bottom Layer w0.25: v1@89.7,92.725 89.7,101.928 90.778,103.006 90.778,106.418 89.897,107.3 v1@89.8,107.3
  other v1: 89.7,92.7
NetC39_2: C39.2 C40.2 L2.1 R60.1 U5.79 | length 193.1
  Top Layer w0.25: v1@90.2,91.3 90.2,87.026 91.682,85.544 U5.79@91.682,84.101 ; v1(91.4,107.1) 91.7,107.1 92.105,107.505 151.065,107.505 161.415,97.155 161.415,48.876 160.009,47.47 159.977,47.47 159.912,47.405 147.974,47.405 146.066,47.405 146.061,47.4 137.5,47.4 137.2,47.1 135.6,47.1 135.315,47.385 128,47.385 ; L2.1@120.5,43.8 120.5,45.95 R60.1@120.55,46 C39.2@122.8,46 124.185,47.385 128,47.385 ; C40.2@128,46.5 C40.2@128,45.85 128,47.385
  Bottom Layer w0.25: 90.55,93.073 90.55,101.778 91.4,102.628 91.4,107.02 v1@91.32,107.1 ; v1@90.565,91.593 90.565,93.058
  other v1: 90.384,91.484
NetC41_1: C41.1 D20.2 J24.2 Q13.3 | length 15.5
  Top Layer w0.5: Q13.3@133.4,73.2 133.4,72.4 133.8,72 138.7,72 139.45,72.75 C41.1@139.45,73.6 139.375,73.675 D20.2@139.375,76.1 139.51,76.235 J24.2@139.51,80.8
NetC49_1: C49.1 U5.13 X1.1 | length 14.1
  Top Layer w0.25: X1.1@75.645,76.238 76.195,75.688 C49.1@78.72,75.688 78.8,75.768 87.368,75.768 87.826,76.226 U5.13@89.307,76.226
NetC50_1: C50.1 C51.1 L6.2 U5.12 | length 16.1
  Top Layer w0.25: 84.62,76.841 84.735,76.726 U5.12@89.307,76.726
  Top Layer w0.5: L6.2@74.782,79.926 76.782,79.926 C50.1@77.082,80.226 C51.1@79.282,80.226 79.882,80.226 83.267,76.841 84.62,76.841
NetC50_2: C50.2 C51.2 L5.2 U5.10 | length 16.4
  Top Layer w0.25: 84.62,77.688 84.658,77.726 U5.10@89.307,77.726
  Top Layer w0.5: L5.2@74.782,82.126 76.982,82.126 C50.2@77.082,82.026 C51.2@79.282,82.026 79.782,82.026 84.12,77.688 84.62,77.688
NetC52_1: C52.1 U5.15 X1.4 | length 14.5
  Top Layer w0.25: X1.4@75.644,73.313 75.919,73.588 78.588,73.588 78.654,73.654 80.226,75.226 U5.15@89.307,75.226
NetC55_1: C55.1 U5.19 X2.2 | length 21.9
  Top Layer w0.25: C55.1@74.02,62.888 74.02,66.338 X2.2@73.92,66.438 ; U5.19@89.307,73.226 86.658,73.226 81.72,68.288 80.12,68.288 78.32,66.488 X2.2@73.92,66.488 ; X2.2@73.92,66.438 X2.2@73.87,66.488 X2.2@73.92,66.488 ; X2.2@73.92,66.438 X2.2@73.92,66.488
NetC56_1: C56.1 U5.20 X2.1 | length 13.6
  Top Layer w0.25: C56.1@83.42,62.888 83.42,66.438 X2.1@83.37,66.488 83.37,69.038 87.058,72.726 U5.20@89.307,72.726
NetC61_1: C61.1 R95.2 | length 2.4
  Top Layer w0.75: R95.2@11.75,69 14,69 C61.1@14,68.9
NetC61_2: C61.2 C67.2 U6.4 | length 6.7
  Top Layer w0.75: U6.4@9.85,64.405 11.7,64.405 C67.2@11.7,66.85 13.65,66.85 13.9,67.1 C61.2@14,67.1
NetC64_2: C64.2 F1.2 U6.8 | length 7.2
  Top Layer w1: F1.2@4.2,53.25 4.2,53.3 C64.2@4.2,57.5 ; C64.2@4.45,57.5 4.45,60.4 U6.8@4.5,60.4
NetC66_1: C66.1 D11.2 F1.1 | length 24.2
  Top Layer w1: 4.2,49.5 F1.1@4.2,51.35
  Top Layer w1.5: D11.2@3.62,33.088 D11.2@3.62,33.248 ; D11.2@3.72,33.248 6.748,33.248 9,35.5 C66.1@9,39.818 ; 4.2,49.5 4.2,44.8 9.091,39.909 9.1,39.9 C66.1@9.07,39.888
NetD1_1: D1.1 J3.3 J3.4 R44.1 | length 12
  Top Layer w0.5: D1.1@149.295,78.688 149.295,81.213 R44.1@149.42,81.338 149.623,81.135 156.853,81.135 J3.4@158.123,82.405
NetD1_2: D1.2 R13.1 | length 2.7
  Top Layer w0.5: R13.1@145.92,81.338 145.92,78.813 D1.2@146.045,78.688
NetD2_1: D2.1 R16.2 | length 4.5
  Top Layer w0.25: D2.1@23.4,41.975 23.875,41.975 26.2,44.3 R16.2@26.95,44.3
NetD3_1: D3.1 R17.2 | length 4.6
  Top Layer w0.3: D3.1@45.9,41.975 48.325,44.4 R17.2@49.45,44.4
NetD4_1: D4.1 J6.3 J6.4 R96.1 | length 12.4
  Top Layer w0.25: D4.1@149.045,64.688 149.12,64.763 R96.1@149.12,67.438 R96.1@149.323,67.235
  Top Layer w0.5: R96.1@149.323,67.235 156.853,67.235 J6.4@158.123,68.505
NetD4_2: D4.2 R42.1 | length 2.8
  Top Layer w0.5: R42.1@145.62,67.438 145.62,64.863 D4.2@145.795,64.688
NetD5_1: D5.1 R46.2 | length 4.5
  Top Layer w0.3: D5.1@68.5,41.975 70.825,44.3 R46.2@72,44.3
NetD6_1: D6.1 R61.2 | length 4.5
  Top Layer w0.3: D6.1@91.1,41.975 91.375,41.975 93.7,44.3 R61.2@94.6,44.3
NetD7_1: D7.1 J9.3 J9.4 R103.1 | length 12.5
  Top Layer w0.25: D7.1@149.045,50.888 149.12,50.963 R103.1@149.12,53.538 R103.1@149.423,53.235 ; J9.3@155.583,53.235 J9.3@155.683,53.235
  Top Layer w0.5: R103.1@149.423,53.235 J9.3@155.583,53.235 ; J9.3@155.683,53.235 156.953,53.235 158.223,54.505 J9.4@158.123,54.505
NetD7_2: D7.2 R45.1 | length 2.7
  Top Layer w0.5: R45.1@145.62,53.538 145.62,51.063 D7.2@145.795,50.888
NetD8_1: D8.1 Q12.3 R63.1 R107.1 | length 15.5
  Top Layer w0.25: Q12.3@148,36.4 R63.1@150.65,36.4 R107.1@150.65,38.4 ; R107.1@150.65,38.4 150.65,40.85 151.3,41.5 158.075,41.5 D8.1@158.075,40.8
NetD8_2: D8.2 R66.1 | length 2.5
  Top Layer w0.25: D8.2@161.325,40.8 161.325,38.525 R66.1@161.5,38.35
NetD9_1: D9.1 Q10.3 R62.1 R65.1 | length 15.6
  Top Layer w0.25: Q10.3@123.5,36.4 126.15,36.4 R65.1@126.25,36.3 R62.1@126.25,38.4 126.25,40.85 127,41.6 133.175,41.6 D9.1@133.875,40.9
NetD9_2: D9.2 R67.1 | length 2.6
  Top Layer w0.25: D9.2@137.125,40.9 137.3,40.725 R67.1@137.3,38.35
NetD10_1: D10.1 R93.2 | length 5.6
  Top Layer w0.25: D10.1@22.825,77 25.57,79.745 R93.2@25.57,81.448
NetD12_2: D12.2 L13.1 U6.1 | length 9.5
  Top Layer w1: U6.1@9.85,60.595 U6.1@10.9,60.595 ; D12.2@10.9,57.45 U6.1@10.9,60.595 ; L13.1@16,60.2 15.605,60.595 U6.1@10.9,60.595
NetD13_2: D13.2 R98.1 | length 3.2
  Top Layer w0.25: D13.2@3.675,71.6 3.675,73.125 R98.1@4.85,74.3
NetD14_2: 
NetD15_2: D15.2 J8.4 Q5.2 | length 19.3
  Top Layer w1: D15.2@131.9,11 136.2,11 137.2,11
  Top Layer w3: J8.4@133.4,6.9 136.2,9.7 136.2,11 136.2,18.8 v4@135.5,19.5
  other v4: 122.35,19.45 135.35,19.45 120.85,20.95 136.85,20.95 122.35,22.45 135.35,22.45 120.85,23.95 136.85,23.95 122.35,25.45 135.35,25.45 120.85,26.95 136.85,26.95 122.35,28.45 135.35,28.45 120.85,29.95 136.85,29.95 122.35,31.45 125.45,31.45 128.65,31.45 131.85,31.45 135.05,31.45 120.85,32.95 123.85,32.95 127.05,32.95 130.25,32.95 133.45,32.95 136.85,32.95
NetD16_2: D16.2 HS5.A HS5.K J7.4 Q6.2 | length 18.1
  Top Layer w1: D16.2@153.8,11 158.341,11
  Top Layer w3: J7.4@155.96,6.708 158.341,9.089 HS5.A@158.341,19.25
  other v2: 144.75,19.25 157.75,19.25 143.25,20.75 159.25,20.75 144.75,22.25 157.75,22.25 143.25,23.75 159.25,23.75 144.75,25.25 157.75,25.25 143.25,26.75 159.25,26.75 144.75,28.25 157.75,28.25 143.25,29.75 159.25,29.75 144.75,31.25 147.85,31.25 151.05,31.25 154.25,31.25 157.45,31.25 143.25,32.75 146.25,32.75 149.45,32.75 152.65,32.75 155.85,32.75 159.25,32.75
NetD17_1: D17.1 Q9.2 R43.1 R65.2 | length 11.1
  Top Layer w0.25: R65.2@128.15,36.3 128.3,36.45 Q9.2@130.21,36.45 ; v1(130.5,37.3) 130.5,37.4 130.5,36.65 Q9.2@130.7,36.45 ; D17.1@131.375,40.5 131.5,40.5 v1(133.2,38.8) ; v1@133.2,38.35 R43.1@135.2,38.35
  Bottom Layer w0.25: v1(130.5,37.3) 132,38.8 v1(133.2,38.8)
NetD18_1: D18.1 Q11.2 R63.2 R106.1 | length 10.6
  Top Layer w0.25: R63.2@152.55,36.4 Q11.2@155,36.4 154.8,36.6 v1(154.8,37.2) ; D18.1@155.575,40.4 v1@157.275,38.7 ; v1@157.75,38.35 R106.1@159.4,38.35
  Bottom Layer w0.25: v1(154.8,37.2) 156.3,38.7 v1(157.4,38.7)
NetJ11_1: J11.1 L9.1 | length 5.3
  Top Layer w0.5: J11.1@12.828,84.42 13.852,84.42 15.552,86.12 L9.1@17.378,86.12
NetJ11_2: J11.2 R90.1 | length 9.7
  Top Layer w0.25: J11.2@12.828,86.92 14.793,88.885 21.25,88.885 R90.1@21.25,88.4
NetJ11_3: J11.3 R87.1 R91.1 | length 16.4
  Top Layer w0.25: J11.3@10.828,86.92 12.3,88.392 13.608,88.392 14.59,89.375 20.825,89.375 R91.1@21.25,89.8 22.1,89.8 22.2,89.7 22.2,87.5 21.43,86.73 R87.1@21.43,86.228
NetJ11_4: J11.4 L12.1 | length 8.3
  Top Layer w0.5: J11.4@10.828,84.42 10.828,83.372 11.412,82.788 14.62,82.788 15.702,83.87 L12.1@17.378,83.87
NetJ17_1: J17.1 L11.2 R10.2 | length 10.4
  Top Layer w0.5: L11.2@127.9,50.3 127.8,50.4 R10.2@127.8,52.5 127.8,60.38 J17.1@128.02,60.6
NetJ17_3: J17.3 R5.2 | length 8.1
  Top Layer w0.5: R5.2@138.1,52.5 138.18,52.58 J17.3@138.18,60.6
NetL9_2: L9.2 R89.1 | length 3.2
  Top Layer w0.5: L9.2@19.178,86.12 19.23,86.12 R89.1@21.43,83.92
NetL10_2: L10.2 R5.1 R10.1 | length 9.5
  Top Layer w0.3: R10.1@129.8,52.4 129.9,52.5 R5.1@136.1,52.5 ; R5.1@136.2,52.5 R5.1@136.1,52.5 ; L10.2@138.1,50.3 138.1,50.5 R5.1@136.1,52.5
NetLS1_1: LS1.1 R84.2 R85.1 | length 22.4
  Top Layer w0.25: R85.1@62.25,73 62.25,73.308 R84.2@60.32,75.238 59.3,76.258 59.3,81.9 v1(62.5,85.1)
  Bottom Layer w0.25: v1(62.5,85.1) 62.6,85.2 LS1.1@62.6,92.8
NetLS1_2: LS1.2 Q8.3 R84.1 | length 8.8
  Top Layer w0.25: R84.1@60.32,77.138 60.87,76.588 Q8.3@62.42,76.588 ; Q8.3@62.52,76.688 Q8.3@62.42,76.588 ; LS1.2@62.6,82.8 62.42,82.62 Q8.3@62.42,76.588
NetP1_3: P1.3 U1.17 | length 9.5
  Top Layer w0.24: P1.3@25.4,28.8 25.5,28.8 28.17,31.47 U1.17@33.803,31.47
NetP2_3: P2.3 U2.17 | length 9.5
  Top Layer w0.25: P2.3@47.9,28.76 48.26,28.76 50.97,31.47 U2.17@56.303,31.47
NetP3_3: P3.3 U3.17 | length 9.5
  Top Layer w0.25: P3.3@70.5,28.86 70.66,28.86 73.27,31.47 77.793,31.47 U3.17@78.903,31.47
NetP4_3: P4.3 U4.17 | length 9.6
  Top Layer w0.25: P4.3@93.1,28.86 95.71,31.47 U4.17@101.603,31.47
NetQ1_1: Q1.1 R24.1 | length 4.1
  Top Layer w0.24: R24.1@24.85,39.8 24.85,41.45 25.75,42.35 Q1.1@26.9,42.35
NetQ1_3: Q1.3 R16.1 | length 2.6
  Top Layer w0.24: R16.1@28.85,44.3 28.9,44.25 Q1.3@28.9,41.7
NetQ2_1: Q2.1 R25.1 | length 4
  Top Layer w0.24: R25.1@47.35,39.8 47.35,41.15 48.6,42.4 49.32,42.4 Q2.1@49.4,42.32
NetQ2_3: Q2.3 R17.1 | length 2.8
  Top Layer w0.24: R17.1@51.35,44.4 51.35,41.72 Q2.3@51.4,41.67
NetQ3_1: Q3.1 R53.1 | length 4
  Top Layer w0.25: R53.1@69.95,39.8 69.95,41.35 70.95,42.35 Q3.1@72,42.35
NetQ3_3: Q3.3 R46.1 | length 2.6
  Top Layer w0.24: R46.1@73.9,44.3 73.9,41.8 Q3.3@74,41.7
NetQ4_1: Q4.1 R54.1 | length 3.9
  Top Layer w0.3: R54.1@92.55,39.8 92.55,41.15 93.8,42.4 94.55,42.4 Q4.1@94.6,42.35
NetQ4_3: Q4.3 R61.1 | length 2.6
  Top Layer w0.3: R61.1@96.5,44.3 96.5,41.8 Q4.3@96.6,41.7
NetQ5_1: Q5.1 Q9.3 R71.2 | length 46.4
  Top Layer w0.25: R71.2@118.5,36.45 118.5,35.285 ; Q5.1@126.5,15 118.5,15 117.1,16.4 117.1,33.9 117.115,33.9 118.5,35.285 ; Q9.3@132.7,37.4 132.7,36.2 131.785,35.285 118.5,35.285
NetQ6_1: Q6.1 Q11.3 R94.2 | length 46.5
  Top Layer w0.25: 143.4,35.285 R94.2@143.4,36.45 ; Q6.1@148.92,15 142.2,15 140.6,16.6 140.6,34.575 141.31,35.285 156.285,35.285 156.9,35.9 156.9,37.25 Q11.3@157,37.35
NetQ7_1: Q7.1 R15.1 R76.1 | length 5.6
  Top Layer w0.5: R76.1@25.63,83.92 25.63,84.548 26.88,85.798 Q7.1@27.52,85.798 29.92,85.798 R15.1@30.02,85.698
NetQ7_3: Q7.3 R87.2 | length 2.2
  Top Layer w0.5: R87.2@23.33,86.228 24.83,86.228 Q7.3@25.35,86.748
NetQ8_1: Q8.1 R99.2 R100.2 | length 5.5
  Top Layer w0.3: Q8.1@64.42,75.938 65.92,75.938 R100.2@66.62,75.238 64.67,73.288 R99.2@64.67,72.988
NetQ9_1: Q9.1 R62.2 | length 2.6
  Top Layer w0.25: R62.2@128.15,38.4 130.65,38.4 Q9.1@130.7,38.35
NetQ10_1: Q10.1 R69.2 | length 2.8
  Top Layer w0.25: R69.2@122.55,40.5 124.15,38.9 Q10.1@124.15,38.4
NetQ11_1: Q11.1 R107.2 | length 2.5
  Top Layer w0.25: R107.2@152.55,38.4 152.65,38.3 Q11.1@155,38.3
NetQ12_1: Q12.1 R68.2 | length 2.5
  Top Layer w0.25: R68.2@147.55,40.4 148.65,39.3 Q12.1@148.65,38.4
NetQ13_1: Q13.1 R11.2 | length 6.1
  Top Layer w0.5: R11.2@130.7,75.15 130.7,76.4 131.1,76.8 133.6,76.8 134.05,76.35 Q13.1@134.05,75.2